# Altium PCB xiaochequdongban.PcbDoc
Units mil, origin at the board's own origin, x right, y up, seen from the top; angles counter-clockwise.
Board outline 2700 x 2350 mil, 2 copper layers (Top Layer, Bottom Layer); 47 components, 44 nets, 174 pads, 0 vias.
Unrouted connection lines stored in the file: 5.
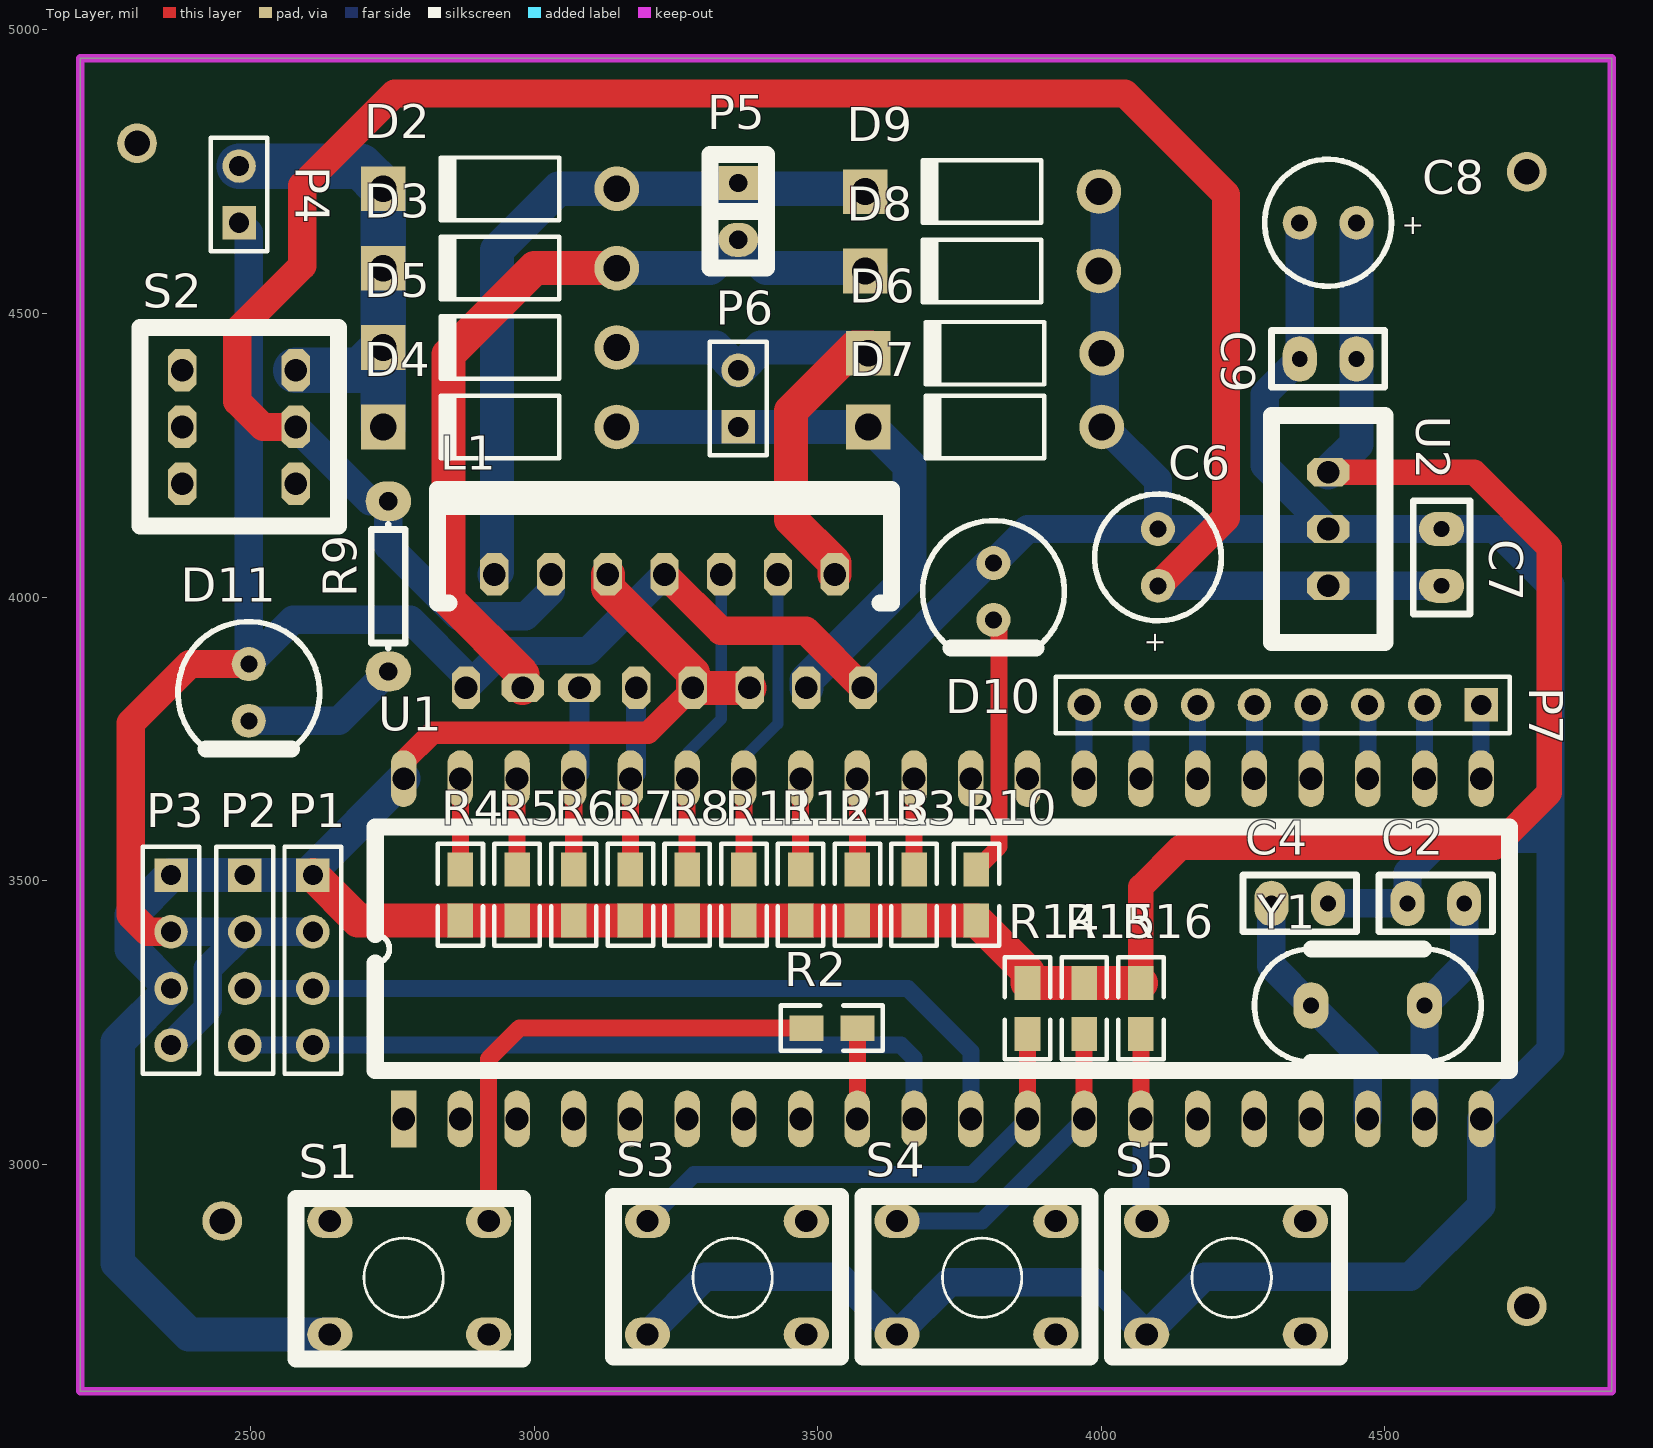
[diagram p0: Top Layer view]
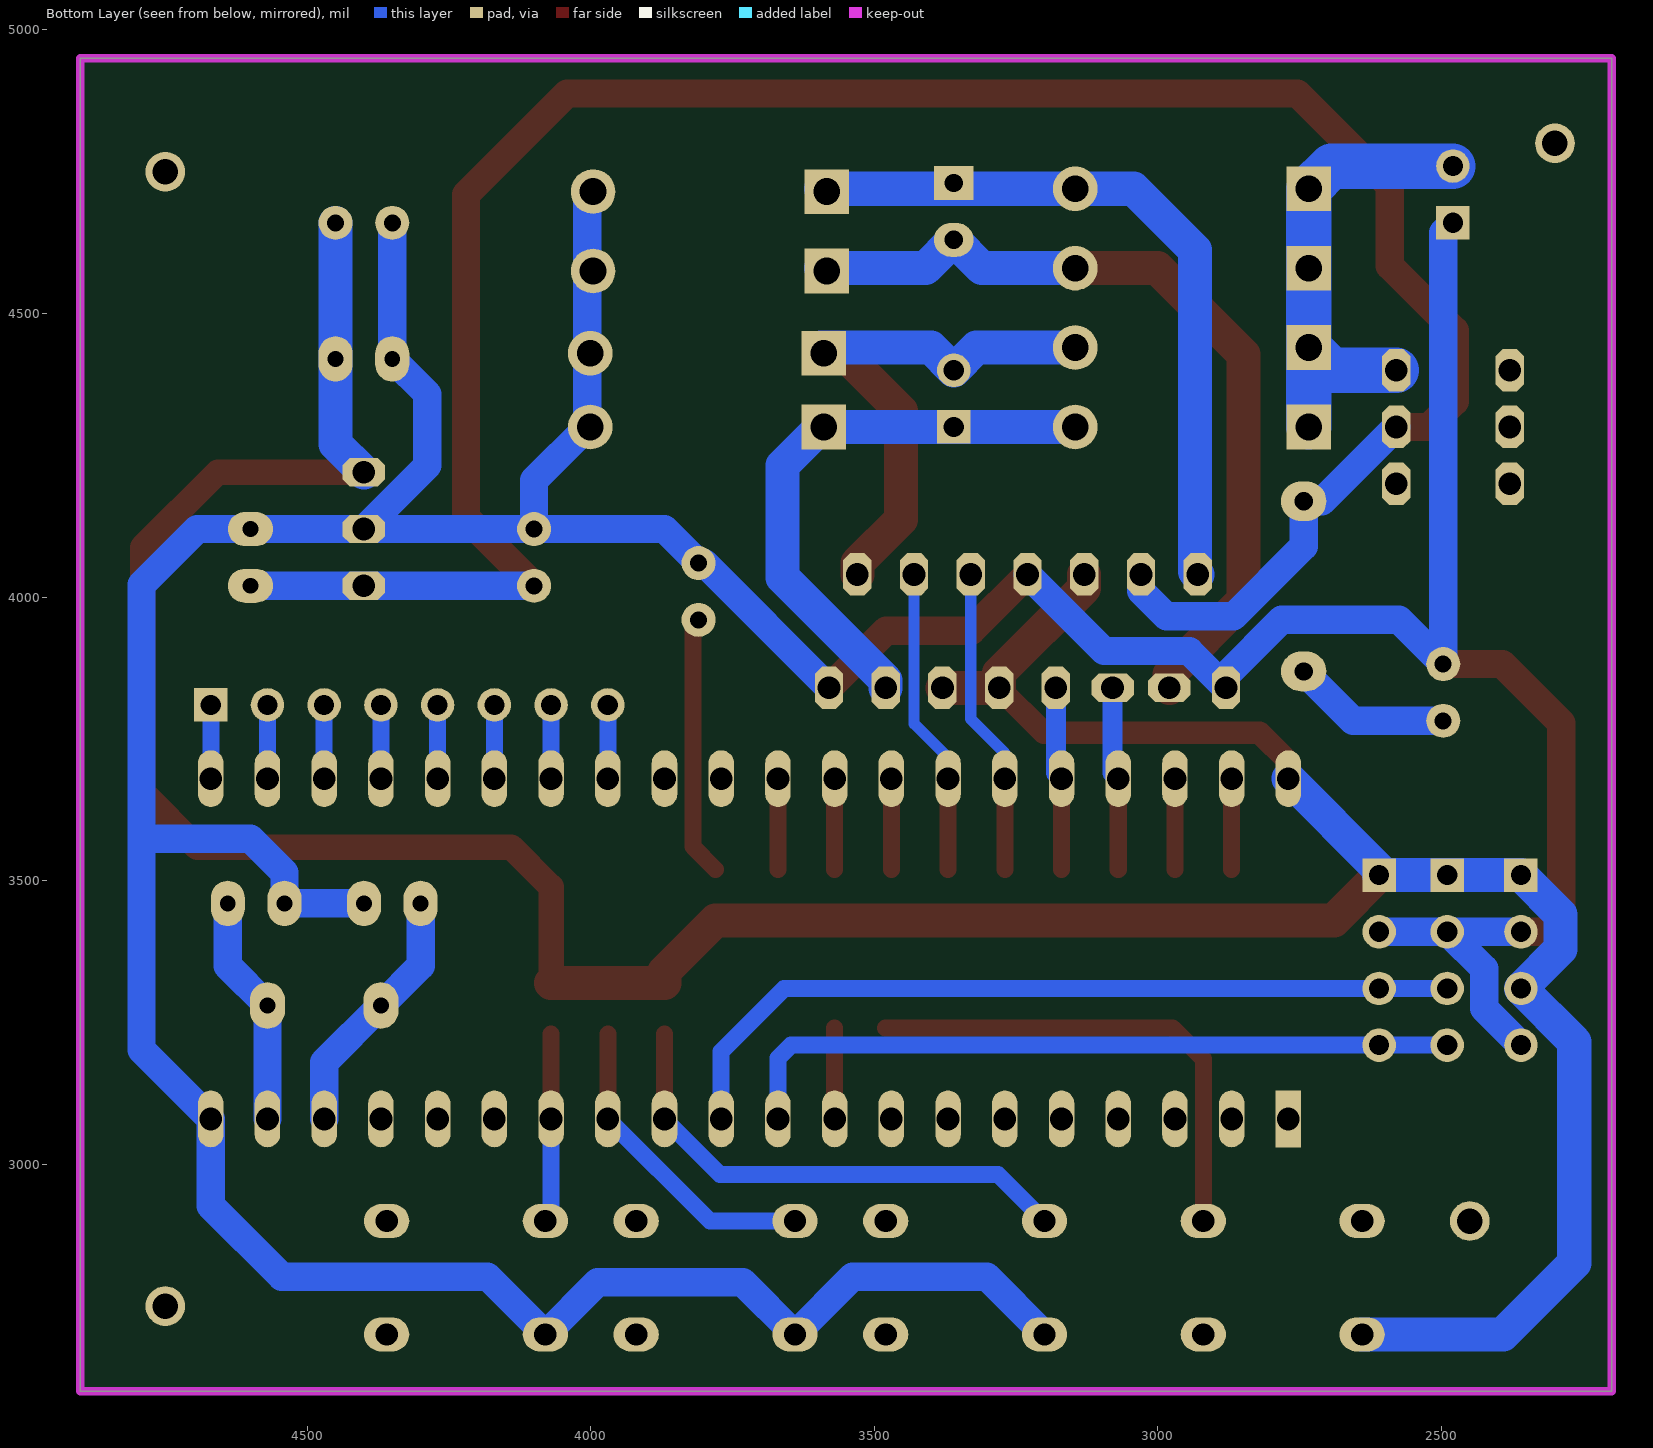
[diagram p1: Bottom Layer view, seen from below]

## Layer stack, top to bottom
Top Solder: solder mask 0.4, Solder Resist, Dk 3.5
Top Layer: signal copper 1.4
Dielectric 1: dielectric 12.6, FR-4, Dk 4.8
Bottom Layer: signal copper 1.4
Bottom Solder: solder mask 0.4, Solder Resist, Dk 3.5

## Board outline
2200,2600 4900,2600 4900,4950 2200,4950

## Design rules (kind name [scope] priority, off if disabled: settings)
Clearance [All] p1: gap=10
PolygonConnect [All] p1: connectstyle=Relief reliefconductorwidth=10 reliefentries=4 polygonreliefangle="90 Angle" airgapwidth=10
RoutingVias [All] p1: holewidth=28 width=50 viastyle="Through Hole" minholewidth=28 minwidth=50 maxholewidth=28 maxwidth=50
SolderMaskExpansion [All] p1: expansion=4
Width [All] p1: maxlimit=100 minlimit=10 preferedwidth=30
30 further rules are at their usual default settings.

## Components (designator, comment, footprint, x,y, rotation, side; value= is the part's Value field where it differs from the comment)
C2 "Cap" RAD0.1 4590,3460 r180 top
C4 "Cap" RAD0.1 4350,3460 r0 top
C6 "Cap Pol1" CAP-E 4100,4020 r270 top
C7 "Cap" RAD0.1 4600,4070 r270 top
C8 "Cap Pol1" CAP-E 4450,4660 r0 top
C9 "Cap" RAD0.1 4400,4420 r0 top
D2 "Diode 1N4007" DO-41 2940,4720 r180 top
D3 "Diode 1N4007" DO-41 2940,4580 r180 top
D4 "Diode 1N4007" DO-41 2940,4300 r180 top
D5 "Diode 1N4007" DO-41 2940,4440 r180 top
D6 "Diode 1N4007" DO-41 3795,4430 r180 top
D7 "Diode 1N4007" DO-41 3795,4300 r180 top
D8 "Diode 1N4007" DO-41 3790,4575 r180 top
D9 "Diode 1N4007" DO-41 3790,4715 r180 top
D10 "LED0" LED 3810,3960 r270 top
D11 "LED0" LED 2497,3782 r270 top
L1 "L?" L298N 2880,3840 r0 top
P1 "Header 4" HDR1X4 2610,3510 r270 top
P2 "Header 4" HDR1X4 2490,3510 r270 top
P3 "Header 4" HDR1X4 2360,3510 r270 top
P4 "+12输入" HDR1X2 2480,4660 r90 top
P5 "Header 2" SIP2 3360,4680 r270 top
P6 "Header 2" HDR1X2 3360,4300 r90 top
P7 "Header 8" HDR1X8 4670,3810 r180 top
R2 "Res2" 0805 3480,3240 r0 top
R3 "Res2" 0805 3670,3520 r270 top
R4 "Res2" 0805 2870,3430 r90 top
R5 "Res2" 0805 2970,3430 r90 top
R6 "Res2" 0805 3070,3430 r90 top
R7 "Res2" 0805 3170,3430 r90 top
R8 "Res2" 0805 3270,3430 r90 top
R9 "Res2" AXIAL0.3 2743,4019 r90 top
R10 "Res2" 0805 3780,3520 r270 top
R11 "Res2" 0805 3370,3430 r90 top
R12 "Res2" 0805 3470,3430 r90 top
R13 "Res2" 0805 3570,3430 r90 top
R14 "Res2" 0805 3870,3230 r90 top
R15 "Res2" 0805 3970,3230 r90 top
R16 "Res2" 0805 4070,3230 r90 top
S1 "SW-PB" KeyA 2960,2660 r180 top
S2 "SW-SPST" SW-6pin 2480,4300 r0 top
S3 "SW-PB" KeyA 3160,2940 r0 top
S4 "SW-PB" KeyA 3600,2940 r0 top
S5 "SW-PB" KeyA 4040,2940 r0 top
U1 "AT89C51" DIP40 2770,3080 r90 top
U2 "7805" 7805 4400,4120 r90 top
Y1 "12Mhz" XTAL 4470,3280 r0 top

## Footprints (in the part's own frame and the unit in brackets; to place one, negate y for a bottom-side part, rotate by r counter-clockwise, add the part's x,y. Pads: shape width x height; smd on the part's side, far side on the other; paste and mask are expansions set on the pad)
0805 [mil]
  rect 60x45 smd: 1(0,0) 2(90,0)
  silkscreen extent -45,-40 135,40
7805 [mil]
  oct 50x75 hole 40: 1(-100,0) 2(0,0) 3(100,0)
  silkscreen extent -200,-100 200,100
AXIAL0.3 [mil]
  oval 70x80 hole 32: 1(-150,0) 2(150,0)
  silkscreen extent -109,-30 109,30
CAP-E [mil]
  round 60 hole 30: 1(0,0) 2(-100,0)
  silkscreen extent -162,-112 62,112
DIP40 [mil]
  rect 100x45 hole 40: 1(0,0)
  oval 100x45 hole 40: 2(0,-100) 3(0,-200) 4(0,-300) 5(0,-400) 6(0,-500) 7(0,-600) 8(0,-700) 9(0,-800) 10(0,-900) 11(0,-1000) 12(0,-1100) 13(0,-1200) 14(0,-1300) 15(0,-1400) 16(0,-1500) 17(0,-1600) 18(0,-1700) 19(0,-1800) 20(0,-1900) 21(600,-1900) 22(600,-1800) 23(600,-1700) 24(600,-1600) 25(600,-1500) 26(600,-1400) 27(600,-1300) 28(600,-1200) 29(600,-1100) 30(600,-1000) 31(600,-900) 32(600,-800) 33(600,-700) 34(600,-600) 35(600,-500) 36(600,-400) 37(600,-300) 38(600,-200) 39(600,-100) 40(600,0)
  silkscreen extent 85,-1950 515,50
DO-41 [mm] "Diode, Axial; Body 5.2 x 2.7 mm (LxDia. max), Lead Dia. 0.86 mm (max)"
  round 2 hole 1.2: 1(-5.23,0)
  rect 2x2 hole 1.2: 2(5.23,0)
  silkscreen extent -2.65,-1.4 2.75,1.4
HDR1X2 [mm] "Connector; Header; 2 Position"
  rect 1.5x1.5 hole 0.9: 1(0,0)
  round 1.5 hole 0.9: 2(2.54,0)
  silkscreen extent -1.27,-1.27 3.81,1.27
HDR1X4 [mm] "Connector; Header; 4 Position"
  rect 1.5x1.5 hole 0.9: 1(0,0)
  round 1.5 hole 0.9: 2(2.54,0) 3(5.08,0) 4(7.62,0)
  silkscreen extent -1.27,-1.27 8.89,1.27
HDR1X8 [mm] "Connector; Header; 8 Position"
  rect 1.5x1.5 hole 0.9: 1(0,0)
  round 1.5 hole 0.9: 2(2.54,0) 3(5.08,0) 4(7.62,0) 5(10.16,0) 6(12.7,0) 7(15.24,0) 8(17.78,0)
  silkscreen extent -1.27,-1.27 19.05,1.27
KeyA [mil]
  oval 80x60 hole 39.37: 1(40,-40) 2(40,-240) 3(320,-240) 4(320,-40)
  silkscreen extent -20,-280 380,3
L298N [mil]
  oct 50x75 hole 40: 1(0,0) 2(50,200) 4(150,200) 6(250,200) 7(300,0) 8(350,200) 9(400,0) 10(450,200) 11(500,0) 12(550,200) 13(600,0) 14(650,200) 15(700,0)
  oct 75x50 hole 40: 3(100,0) 5(200,0)
  silkscreen extent -50,150 750,350
LED [mil]
  round 60 hole 30: 1(0,0) 2(-100,0)
  silkscreen extent -175,-125 50,125
RAD0.1 [mil]
  oval 60x80 hole 28: 1(-50,0) 2(50,0)
  silkscreen extent -100,-50 100,50
SIP2 [mil]
  rect 60x70 hole 32: 1(-50,0)
  oval 60x70 hole 32: 2(50,0)
  silkscreen extent -100,-50 100,50
SW-6pin [mil]
  oct 50x75 hole 40: 1(100,100) 2(100,0) 3(100,-100) 4(-100,-100) 5(-100,0) 6(-100,100)
  silkscreen extent -175,-175 175,175
XTAL [mil]
  oval 62x82 hole 28: 1(-100,0) 2(100,0)
  silkscreen extent -200,-100 200,100

## Part data
C2 C4 C7 C9: "Capacitor"
C6 C8: "Polarized Capacitor (Radial)"
D2 D3 D4 D5 D6 D7 D8 D9: "1 Amp General Purpose Rectifier"
D10 D11: "Typical INFRARED GaAs LED"
L1: library part L298N
P1 P2 P3: "Header, 4-Pin"
P4: library part "Header 2", "Header, 2-Pin"
P5 P6: "Header, 2-Pin"
P7: "Header, 8-Pin"
R2 R3 R4 R5 R6 R7 R8 R9 R10 R11 R12 R13 R14 R15 R16: "Resistor"
S1 S3 S4 S5: "Switch"
S2: "Single-Pole, Single-Throw Switch"
Y1: library part XTAL, "Crystal Oscillator"

## Free pads (board coordinates)
  round 70 hole 45: 0(4750,4750) 1(2300,4800) 2(2450,2900) 3(4750,2750)

## Nets (pads, with @x,y where several pads share a name; then routed paths per layer and width w, separated by ;. In a path a pad name is that pad's centre, name@x,y a point inside that pad or via, vN(x,y) a via of type N, cw(c..) or ccw(c..) an arc to the next point about the centre after c; other vN are vias at no path point)
+12V: D2.2 D3.2 D4.2 D5.2 P4.2 S2.1 | length 861.3
  Bottom Layer w80: P4.2 2694.09,4760 D2.2 D3.2 D5.2 ; S2.1 2694.09,4400 D5.2 ; D4.2 D5.2
GND: C2.2 C4.2 C6.2 C7.1 C8.2 C9.1 D6.1 D7.1 D8.1 D9.1 D10.2 D11.2 L1.1 L1.8 L1.15 P1.2 P2.2 P3.2 P3.4 P4.1 S3.2 S4.2 S5.2 U1.20 U2.2 | length 9265.7
  Top Layer w50: P3.2 2319,3410 2289,3440 2289,3778 2393,3882 D11.2 ; L1.8 3329,3941 3479,3941 L1.15
  Bottom Layer w50: P3.4 2425,3275 2425,3345 P2.2 ; P3.2 P2.2 ; P4.1 2497,4643 D11.2 2575,3960 2782,3960 2880,3862 L1.1 2945,3905 3095,3905 L1.8 ; P1.2 P2.2 ; S3.2 3302,2802 3538,2802 S4.2 3732,2792 3988,2792 S5.2 4182,2802 4545,2802 4670,2927 U1.20 4792,3202 4792,3574 ; L1.15 3800,4060 D10.2 3870,4120 C6.2 ; D9.1@4005.91,4720 4005.91,4580 4005.91,4440 4005.91,4300 4100,4205.91 C6.2 ; C8.2 C9.1 4288,4358 4288,4232 U2.2 ; C4.2 C2.2 4540,3514 4600,3574 4792,3574 ; C6.2 U2.2 ; U2.2 C7.1 4694,4120 4792,4022 4792,3574
IN0: P7.1 U1.21 | length 132.1
  Bottom Layer w30: U1.21@4665,3680 4670,3685 P7.1
IN1: P7.2 U1.22 | length 132.1
  Bottom Layer w30: U1.22@4565,3680 4570,3685 P7.2
IN2: P7.3 U1.23 | length 132.1
  Bottom Layer w30: U1.23@4465,3680 4470,3685 P7.3
IN3: P7.4 U1.24 | length 132.1
  Bottom Layer w30: U1.24@4365,3680 4370,3685 P7.4
IN4: P7.5 U1.25 | length 132.1
  Bottom Layer w30: U1.25@4265,3680 4270,3685 P7.5
IN5: P7.6 U1.26 | length 132.1
  Bottom Layer w30: U1.26@4165,3680 4170,3685 P7.6
IN6: P7.7 U1.27 | length 132.1
  Bottom Layer w30: U1.27@4065,3680 4070,3685 P7.7
IN7: P7.8 U1.28 | length 132.1
  Bottom Layer w30: U1.28@3965,3680 3970,3685 P7.8
KEY0: R14.1 S3.1 U1.12 | length 894.6
  Top Layer w30: U1.12 R14.1
  Bottom Layer w30: S3.1 3282,2982 3772,2982 U1.12
KEY1: R15.1 S4.1 U1.13 | length 554.6
  Top Layer w30: U1.13 R15.1
  Bottom Layer w30: S4.1 3790,2900 U1.13
KEY2: R16.1 S5.1 U1.14 | length 334.1
  Top Layer w30: U1.14 R16.1
  Bottom Layer w30: U1.14 4070,2910 S5.1
NetD10_1: D10.1 R10.1 | length 460.7
  Top Layer w30: R10.1 3820,3560 3820,3950 D10.1
NetD11_1: D11.1 R9.1 | length 282
  Bottom Layer w50: D11.1 2656,3782 R9.1
NetR2_1: R2.1 S1.2 | length 868.4
  Top Layer w30: S1.2 2920,3186 2974,3240 R2.1
NetR3_1: R3.1 U1.31 | length 160
  Top Layer w30: R3.1 U1.31
OUT1: D2.1 D9.2 L1.2 P5.1 | length 1277.9
  Bottom Layer w60: L1.2 2935,4045 2935,4612 3043,4720 D2.1 D9.2@3594.09,4720
OUT2: D3.1 D8.2 L1.3 P5.2 | length 1491.7
  Top Layer w60: L1.3 2980,3864 2849,3995 2849,4428 3001,4580 D3.1
  Bottom Layer w60: D3.1 3310,4580 P5.2 3410,4580 D8.2@3594.09,4580
OUT3: D4.1 D7.2 L1.13 P6.1 | length 1011.7
  Bottom Layer w60: D4.1 P6.1 3594.09,4300 3662,4232.09 3662,4035 3480,3853 L1.13
OUT4: D5.1 D6.2 L1.14 P6.2 | length 988.7
  Top Layer w60: L1.14 3530,4060 3453,4137 3453,4328 3565,4440 D6.2@3594.09,4440
  Bottom Layer w60: D5.1 3320,4440 P6.2 3400,4440 D6.2@3594.09,4440
RESET: R2.2 U1.9 | length 160
  Top Layer w30: U1.9 R2.2
RESPACK0: U1.1
RESPACK00: R4.2 U1.39 | length 160
  Top Layer w30: R4.2 U1.39
RESPACK01: R5.2 U1.38 | length 160
  Top Layer w30: R5.2 U1.38
RESPACK1: U1.2
RESPACK02: L1.5 R6.2 U1.37 | length 324.1
  Top Layer w30: R6.2 U1.37
  Bottom Layer w30: U1.37 U1.37@3080,3690
  Bottom Layer w35: U1.37@3080,3690 L1.5
RESPACK2: U1.3
RESPACK03: L1.7 R7.2 U1.36 | length 324.1
  Top Layer w30: R7.2 U1.36
  Bottom Layer w30: U1.36 U1.36@3180,3690
  Bottom Layer w35: U1.36@3180,3690 L1.7
RESPACK3: U1.4
RESPACK04: L1.10 R8.2 U1.35 | length 544.9
  Top Layer w30: R8.2 U1.35
  Bottom Layer w20: U1.35 3270,3725 3330,3785 L1.10
RESPACK4: U1.5
RESPACK05: L1.12 R11.2 U1.34 | length 544.9
  Top Layer w30: R11.2 U1.34
  Bottom Layer w20: U1.34 3370,3717 3430,3777 L1.12
RESPACK5: U1.6
RESPACK06: R12.2 U1.33 | length 160
  Top Layer w30: R12.2 U1.33
RESPACK6: U1.7
RESPACK07: R13.2 U1.32 | length 160
  Top Layer w30: R13.2 U1.32
RESPACK7: U1.8
RX: P1.3 P2.3 U1.10 | length 1296.5
  Bottom Layer w30: 2490,3210 2610,3210 3647,3210 3670,3187 U1.10
SW: C6.1 C7.2 L1.4 R9.2 S2.2 U2.1 | length 4241.1
  Top Layer w50: S2.2 2522,4300 2477,4345 2477,4470 2591,4584 2591,4725 2754,4888 4042,4888 4220,4710 4220,4140 C6.1
  Bottom Layer w50: S2.2 2711,4169 R9.2 2743,4090 2867,3966 2985,3966 3030,4011 L1.4 ; C6.1 U2.1 C7.2
TX: P1.4 P2.4 U1.11 | length 1445
  Bottom Layer w30: 2490,3310 2610,3310 3659,3310 3770,3199 U1.11
VCC: C8.1 C9.2 L1.6 L1.9 L1.11 P1.1 P2.1 P3.1 P3.3 R3.2 R4.1 R5.1 R6.1 R7.1 R8.1 R10.2 R11.1 R12.1 R13.1 R14.2 R15.2 R16.2 S1.1 U1.40 U2.3 | length 6495.9
  Top Layer w40: U1.40 2770,3710 2821,3761 3201,3761 L1.9
  Top Layer w45: R16.2 4070,3489 4140,3559 4694,3559 4790,3655 4790,4088 4658,4220 U2.3
  Top Layer w60: P1.1 2690,3430 R4.1 R5.1 R6.1 R7.1 R8.1 R11.1 R12.1 R13.1 R3.2 R10.2 3870,3340 R14.2 R15.2 R16.2 ; L1.6 3130,4016 3280,3866 L1.9 L1.11
  Bottom Layer w60: 2640,2700 2392,2700 2266,2826 2266,3216 P3.3 2290,3380 2290,3440 P3.1 P2.1 P1.1 2610,3520 U1.40 ; U2.3 4450,4270 C9.2 C8.1
X1: C2.1 U1.19 Y1.2 | length 409
  Bottom Layer w50: U1.19 Y1.2 4640,3350 C2.1
X2: C4.1 U1.18 Y1.1 | length 450.4
  Bottom Layer w50: C4.1 4300,3350 Y1.1 4470,3180 U1.18
pads on no net: S1.3 S1.4 S2.3 S2.4 S2.5 S2.6 S3.3 S3.4 S4.3 S4.4 S5.3 S5.4 U1.15 U1.16 U1.17 U1.29 U1.30

## Keep-outs
Keep-Out Layer:
  the board outline again, w15

## Text inside footprints (layer, text, board x,y; h text height)
C6: Top Overlay "+" at 4080,3940 h35 r270
C8: Top Overlay "+" at 4530,4640 h35